# EAGLE board penvmon (EAGLE 9.6.2)

Size 92.69 x 100 mm. Coordinates in mm from the lower left corner, seen from the top.
Outline: 0,0 92.69,0 92.69,100 0,100 0,0
Copper layers (1*16): Top 0.035mm / dielectric 1.5mm / Bottom 0.035mm
Design rules "default *": minimum track width 6mil, minimum drill 0.35mm, track to track 6mil, track to pad 6mil, pad to pad 6mil, via to via 6mil, smd to smd 6mil, copper to edge 40mil, drill to drill 6mil, minimum pad ring 20mil, minimum via ring 20mil, stop-mask expansion 4mil, vias tented up to drill 0mil, thermal gap 10mil

## Footprints (pad centres in the part's own frame; a part is rotated, then mirrored left to right if it is on the bottom)
E3,5-8 = drill 0.813 pad 1.6: + -1.778,0 | drill 0.813 pad 1.6 octagon: - 1.778,0
LED_3MM = drill 0.813 pad 1.88: A -1.27,0; K 1.27,0
JP4 = drill 0.914 long: 1 -3.81,0; 2 -1.27,0; 3 1.27,0; 4 3.81,0
TO220V = drill 1.016 long: 1 -2.54,-2.54; 2 0,-2.54; 3 2.54,-2.54
61200821621 = drill 1.1: 1 -3.81,-1.27; 2 -3.81,1.27; 3 -1.27,-1.27; 4 -1.27,1.27; 5 1.27,-1.27; 6 1.27,1.27; 7 3.81,-1.27; 8 3.81,1.27
1X15 = drill 1.016 long: 1 -17.78,0; 2 -15.24,0; 3 -12.7,0; 4 -10.16,0; 5 -7.62,0; 6 -5.08,0; 7 -2.54,0; 8 0,0; 9 2.54,0; 10 5.08,0; 11 7.62,0; 12 10.16,0; 13 12.7,0; 14 15.24,0; 15 17.78,0
JP1 = drill 0.914 long: 1 0,-1.27; 2 0,1.27
M0805 = smd 1.3 x 1.6: 1 -0.95,0; 2 0.95,0
FE08 = drill 0.813 long: 1 -8.89,0; 2 -6.35,0; 3 -3.81,0; 4 -1.27,0; 5 1.27,0; 6 3.81,0; 7 6.35,0; 8 8.89,0
MODULE_A000005 = drill 1 square: 1 -7.62,17.78 | drill 1: 2 -7.62,15.24; 3 -7.62,12.7; 4 -7.62,10.16; 5 -7.62,7.62; 6 -7.62,5.08; 7 -7.62,2.54; 8 -7.62,0; 9 -7.62,-2.54; 10 -7.62,-5.08; 11 -7.62,-7.62; 12 -7.62,-10.16; 13 -7.62,-12.7; 14 -7.62,-15.24; 15 -7.62,-17.78; 16 7.62,-17.78; 17 7.62,-15.24; 18 7.62,-12.7; 19 7.62,-10.16; 20 7.62,-7.62; 21 7.62,-5.08; 22 7.62,-2.54; 23 7.62,0; 24 7.62,2.54; 25 7.62,5.08; 26 7.62,7.62; 27 7.62,10.16; 28 7.62,12.7; 29 7.62,15.24; 30 7.62,17.78 | hole 1.651: -7.62,-20.32; 7.62,-20.32; -7.62,20.32; 7.62,20.32
MODULE_ZC563900 = drill 0.889 pad 1.753 square: 1 -11.43,17.78 | drill 0.889 pad 1.753: 2 -11.43,15.24; 3 -11.43,12.7; 4 -11.43,10.16; 5 -11.43,7.62; 6 -11.43,5.08; 7 -11.43,2.54; 8 -11.43,0; 9 -11.43,-2.54; 10 -11.43,-5.08; 11 -11.43,-7.62; 12 -11.43,-10.16; 13 -11.43,-12.7; 14 -11.43,-15.24; 15 -11.43,-17.78; 16 11.43,-17.78; 17 11.43,-15.24; 18 11.43,-12.7; 19 11.43,-10.16; 20 11.43,-7.62; 21 11.43,-5.08; 22 11.43,-2.54; 23 11.43,0; 24 11.43,2.54; 25 11.43,5.08; 26 11.43,7.62; 27 11.43,10.16; 28 11.43,12.7; 29 11.43,15.24; 30 11.43,17.78 | hole 3.2: -10.16,21.59; 10.16,21.59; 10.16,-21.59; -10.16,-21.59
PJ-102A = drill 3 pad 4.8: RING 0.1,-3.39; RING_SW -4.6,-6.29; TIP 0.1,-9.29

## Placement (x,y rotation side)
C1  [E3,5-8]  22.86,95.25 270 top
C2  [E3,5-8]  22.86,85.09 90 top
D1  [LED_3MM]  8.89,77.47 180 top
D3  [LED_3MM]  8.89,82.55 0 top
DHT11  [JP4]  57.15,77.47 0 top
I2C_DISP  [JP4]  78.74,54.61 90 top
IC2  7805TV  [TO220V]  36.83,90.17 270 top
J1  [61200821621]  31.75,7.62 0 top
JP1  [1X15]  71.12,50.8 270 top
JP2  [1X15]  40.64,50.8 90 top
JP3  [JP1]  66.04,17.78 90 top
LDR  10k  [M0805]  44.45,8.89 270 top
MPU6050  [FE08]  85.09,49.53 90 top
NANO  A000005  [MODULE_A000005]  55.88,50.8 0 top
NODEMCU  [JP4]  33.02,35.56 270 top
R1  1k  [M0805]  13.97,77.47 0 bottom
R11  1k  [M0805]  3.81,86.36 270 bottom
SOUND_IN  [JP4]  6.35,2.54 0 top
U1  ZC563900  [MODULE_ZC563900]  15.24,48.26 0 top
U$3  2.1MMJACKTHM  [PJ-102A]  5.08,95.25 90 top

## Library data of the parts
C1 C2 JP1 JP2 LDR R1 R11 U$3 = adafruit
D1 D3 = SparkFun-LED; PROD_ID: DIO-08794
DHT11 I2C_DISP JP3 NODEMCU SOUND_IN = jumper
IC2 = linear
J1 = Wurth_Connectors_WR-BHD; CONTACT-RESISTANCE: 20mOhm; DATASHEET-URL: https://katalog.we-online.com/em/datasheet/61200821621.pdf; GENDER: Male; IR: 3A; L: 17.82mm; MATES: WR-BHD 2.54mm Female IDC Connector with Strain Relief; MOUNT: THT; PACKAGING: Tray; PART-NUMBER: 61200821621; PINS: 8; PITCH: 2.54mm; TOL-R: max.; TYPE: Straight; WORKING-VOLTAGE: 250V(AC)
MPU6050 = con-lsta; OC_FARNELL: unknown; OC_NEWARK: unknown
NANO = A000005; AVAILABILITY: Good; DESCRIPTION: ATmega328 Arduino Nano AVR® ATmega AVR MCU 8-Bit Embedded Evaluation Board; MF: Arduino; MP: A000005; PACKAGE: None; PRICE: None; PURCHASE-URL: https://pricing.snapeda.com/search/part/A000005/?ref=eda
U1 = nodemcuZC563900; AVAILABILITY: Unavailable; DESCRIPTION: NodeMcu Lua ESP8266 WIFI Internet of Things Network Development Module Board; MF: YKS; MP: ZC563900; PACKAGE: None; PRICE: None

## Nets
3V3: JP1.14 NANO.17 NODEMCU.1 U1.11 U1.16 U1.25
5V: C2.+ DHT11.4 I2C_DISP.4 IC2.3 JP3.1 MPU6050.8 R1.1 SOUND_IN.2
5V0: JP1.4 NANO.27
9_IN: C1.+ IC2.1 R11.1 U$3.TIP
A1: JP1.11 NANO.20
A2: JP1.10 NANO.21
A3: JP1.9 NANO.22
A6: JP1.6 NANO.25
A7: JP1.5 NANO.26
AD0: MPU6050.2
AREF: JP1.13 NANO.18
BACK: J1.6
D8: JP2.5 NANO.11
D9: JP2.4 NANO.12
D10: JP2.3 NANO.13
D11: JP2.2 NANO.14
D12: JP2.1 NANO.15
DHT: DHT11.3 JP2.11 NANO.5
DOWN: JP2.7 NANO.9
DOWN(NA): J1.4
GND: C1.- C2.- D1.K D3.K DHT11.1 I2C_DISP.3 IC2.2 J1.8 JP1.2 LDR.2 MPU6050.7 NANO.29 NODEMCU.4 SOUND_IN.3 U1.10 U1.14 U1.17 U1.24 U$3.RING U$3.RING_SW
GND_1: JP2.12 NANO.4
INT: MPU6050.1
LDR_SIG: JP1.12 JP3.2 LDR.1 NANO.19
LEFT: J1.5 JP2.9 NANO.7
N$2: D3.A R11.2
N$3: D1.A R1.2
NC: DHT11.2
OK: J1.7 JP2.8 NANO.8
RESET_1: JP2.13 NANO.3
RESET_2: JP1.3 NANO.28
RIGHT: J1.2 JP2.6 NANO.10
RXNANO: JP2.14 NANO.2 NODEMCU.3 U1.18
SCK: JP1.15 NANO.16
SCL: I2C_DISP.2 JP1.7 MPU6050.6 NANO.24
SDA: I2C_DISP.1 JP1.8 MPU6050.5 NANO.23
SOUND_A0: SOUND_IN.4
SOUND_D0: JP2.10 NANO.6 SOUND_IN.1
TXNANO: JP2.15 NANO.1 NODEMCU.2 U1.19
UP(NA): J1.3
VCC: J1.1
VIN: JP1.1 NANO.30
XCL: MPU6050.3
XDA: MPU6050.4

## Tracks (layer width: path | path; a pad name or v marks a point on that pad's centre or on a via)
3V3  (5 unrouted)
5V  (7 unrouted)
5V0  (1 unrouted)
9_IN  (3 unrouted)
A1  (1 unrouted)
A2  (1 unrouted)
A3  (1 unrouted)
A6  (1 unrouted)
A7  (1 unrouted)
AREF  (1 unrouted)
D8  (1 unrouted)
D9  (1 unrouted)
D10  (1 unrouted)
D11  (1 unrouted)
D12  (1 unrouted)
DHT  (2 unrouted)
DOWN  (1 unrouted)
GND  (19 unrouted)
GND_1  (1 unrouted)
LDR_SIG  (3 unrouted)
LEFT  (2 unrouted)
N$2  (1 unrouted)
N$3  (1 unrouted)
OK  (2 unrouted)
RESET_1  (1 unrouted)
RESET_2  (1 unrouted)
RIGHT  (2 unrouted)
RXNANO  (3 unrouted)
SCK  (1 unrouted)
SCL  (3 unrouted)
SDA  (3 unrouted)
SOUND_D0  (2 unrouted)
TXNANO  (3 unrouted)
VIN  (1 unrouted)
(copper drawn outside any net)
  shapes: Top area x2